# Altium PCB 175-00060, rev1, PCB, NRES RTD_TEC Board.PcbDoc (part 2 of 3)
Units mm, origin at the board's own origin, x right, y up, seen from the top; angles counter-clockwise.
Board outline 188.3 x 85 mm, 7 copper layers (Top Layer (*.GTL), MidLayer1 (*.G1), InternalPlane1 (*.GP1), InternalPlane2 (*.GP2), InternalPlane3 (*.GP3), InternalPlane4 (*.GP4), Bottom Layer (*.GBL)); 241 components, 178 nets, 958 pads, 584 vias.
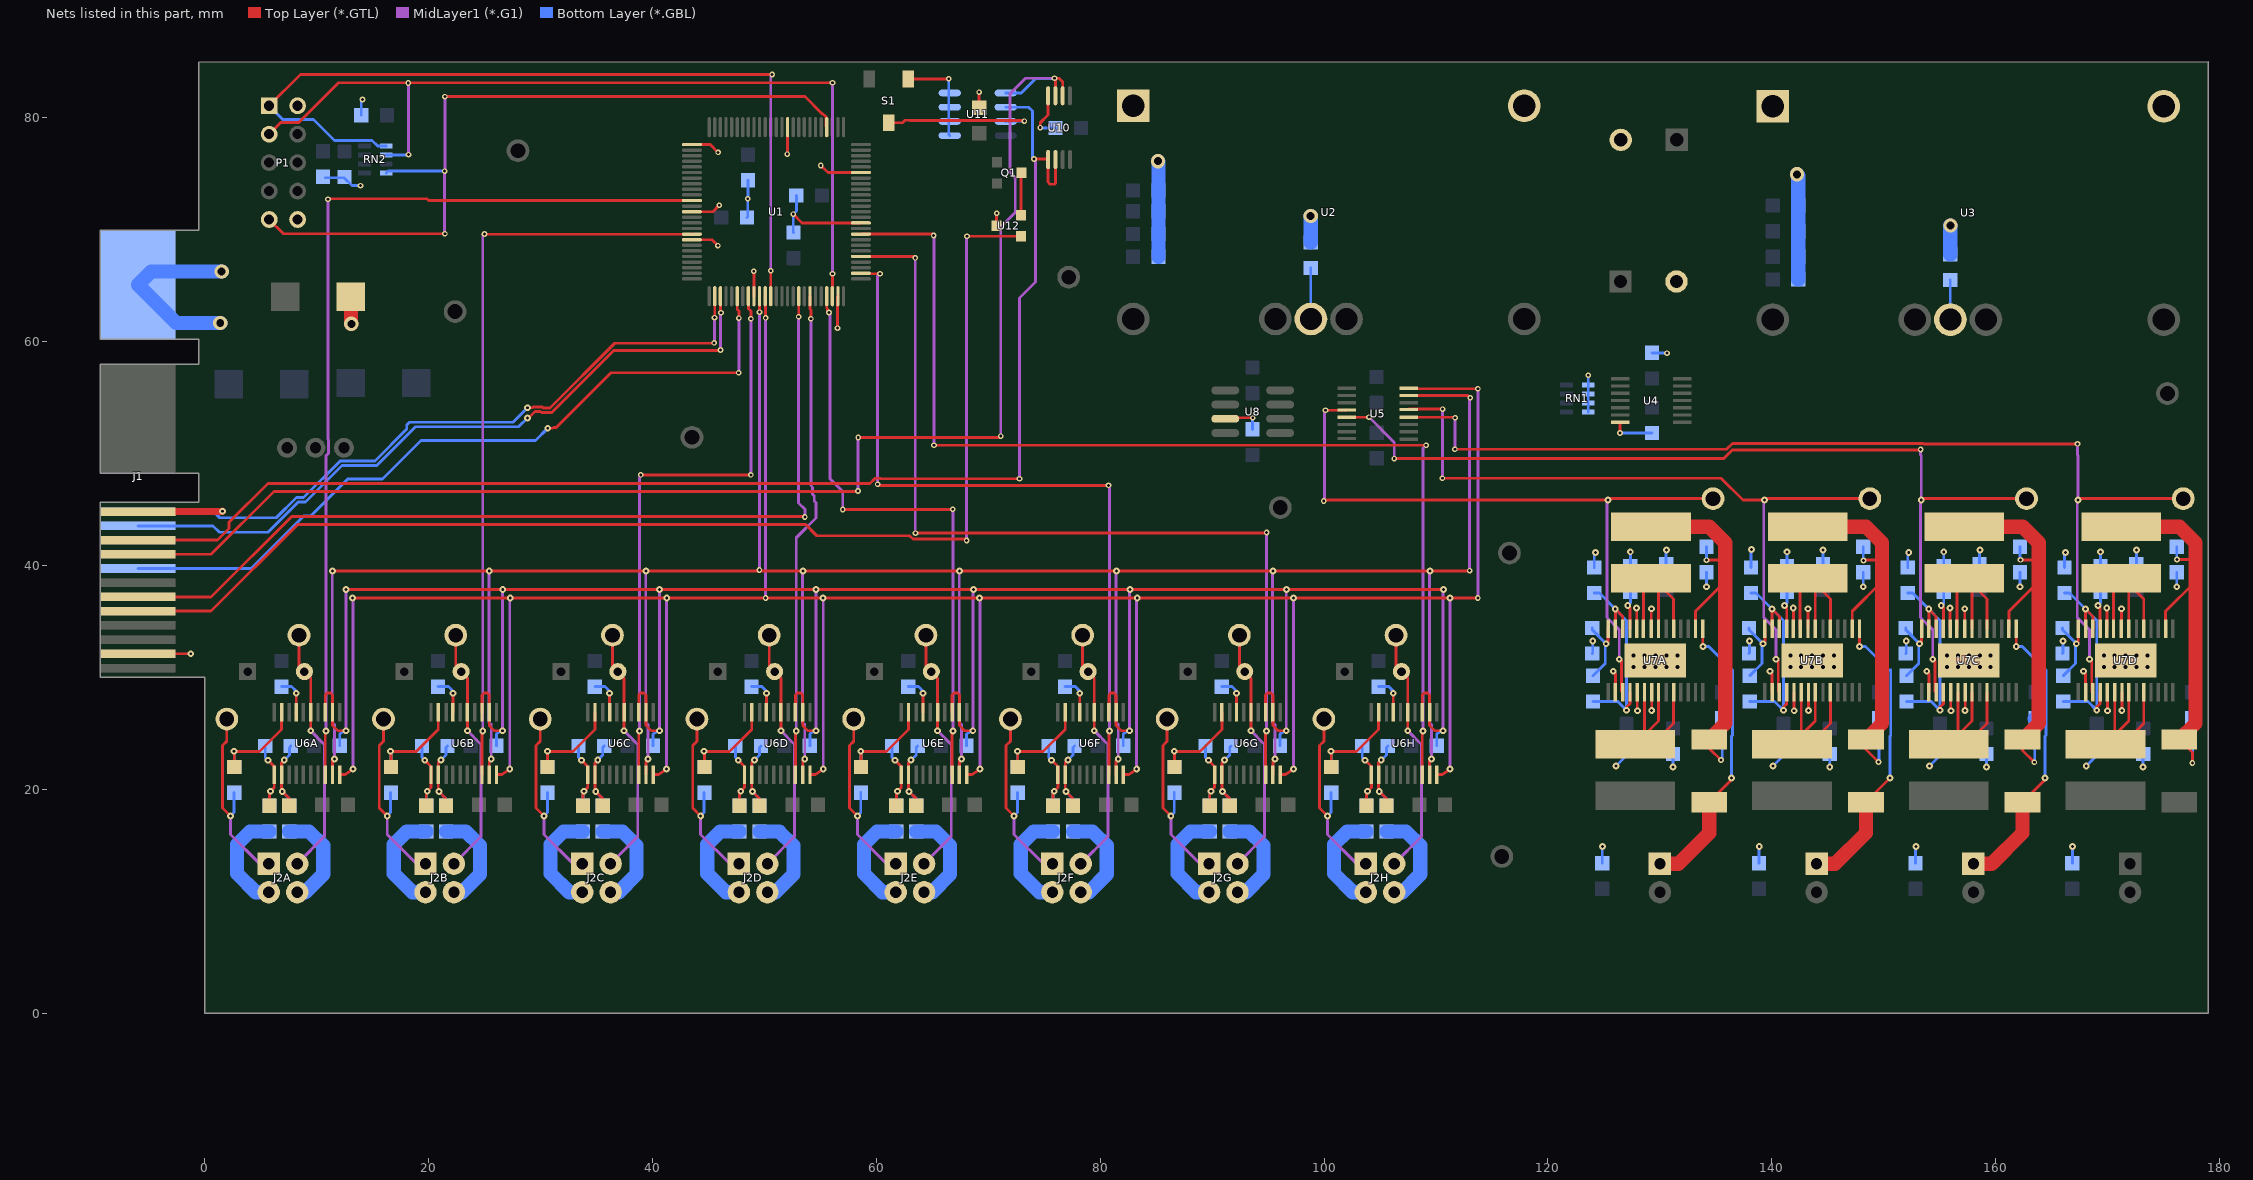
[diagram p7: the nets of this part, all layers, seen from the top]

## Via types
v1: diameter 0.61, hole 0.254, Top Layer (*.GTL) to Bottom Layer (*.GBL), tented both sides, 359 vias
v2: diameter 0.508, hole 0.254, Top Layer (*.GTL) to Bottom Layer (*.GBL), tented both sides, 105 vias
v3: diameter 0.508, hole 0.254, Top Layer (*.GTL) to Bottom Layer (*.GBL), 103 vias
v4: diameter 1.27, hole 0.711, Top Layer (*.GTL) to Bottom Layer (*.GBL), 17 vias

## Nets (pads, with @x,y where several pads share a name; then routed paths per layer and width w, separated by ;. In a path a pad name is that pad's centre, name@x,y a point inside that pad or via, vN(x,y) a via of type N, cw(c..) or ccw(c..) an arc to the next point about the centre after c; other vN are vias at no path point) (continued)
B1: J1.S8 U1.56 | length 67.8
  Top Layer (*.GTL) w0.254: v1(30.658,52.248) 31.086,52.248 31.162,52.324 31.413,52.324 36.29,57.201 v2(47.701,57.201) ; U1.56@47.573,64.038 47.573,62.858 47.727,62.705 v2(47.727,62.078)
  MidLayer1 (*.G1) w0.254: v2(47.701,57.201) 47.727,57.226 v2(47.727,62.078)
  Bottom Layer (*.GBL) w0.254: J1.S8@-5.95,39.715 4.163,39.715 8.872,44.425 9.513,44.425 12.789,47.701 15.88,47.701 19.334,51.156 29.566,51.156 v1(30.658,52.248)
D: C11.2 C12.2 C16A.1 C16B.1 C16C.1 C16D.1 C16E.1 C16F.1 C16G.1 C16H.1 C32.1 C35.2 C36.2 C37.1 C38.1 C39.1 C40.1 C41.1 C42.1 J1.S14 J1.S24 P1.2 P1.10 S1.1 U1.11 U1.26 U1.38 U1.43 U1.59 U1.74 U1.86 U1.95 U4.7 U6A.2 U6A.3 U6B.2 U6B.3 U6C.2 U6C.3 U6D.2 U6D.3 U6E.2 U6E.3 U6F.2 U6F.3 U6G.2 U6G.3 U6H.2 U6H.3 U10.4 U11.1 U11.2 U11.3 U11.4 | length 333.8
  Top Layer (*.GTL) w0.254: J1.S14@-5.95,32.095 v1(-1.234,32.095) v1@-1.219,32.08 ; U6A.3@10.774,26.861 10.774,28.427 10.947,28.6 11.252,28.6 11.424,28.428 11.424,25.685 11.862,25.248 v1(12.624,25.222) ; v1(12.624,37.846) v1(26.632,37.846) v1(40.64,37.846) v1(54.624,37.846) v1(68.675,37.846) v1(82.675,37.846) v1(96.647,37.846) v1(110.675,37.846) ; U6B.3@24.774,26.861 24.774,28.427 24.947,28.6 25.252,28.6 25.424,28.428 25.424,25.685 25.862,25.248 v1(26.624,25.222) ; U6C.3@38.774,26.861 38.774,28.427 38.947,28.6 39.252,28.6 39.424,28.428 39.424,25.685 39.862,25.248 v1(40.624,25.222) ; U1.43@43.523,69.088 45.314,69.088 v3(45.847,68.555) ; U1.38@43.523,71.588 45.401,71.588 v3(45.974,72.161) ; U1.26@43.523,77.588 45.17,77.588 v3(45.872,76.886) ; v3(49.047,66.269) 49.073,66.243 U1.59@49.073,64.038 ; v3(52.045,76.733) 52.073,76.762 U1.11@52.073,79.138 ; v3(52.578,71.374) 53.364,70.588 U1.86@58.623,70.588 ; U6D.3@52.774,26.861 52.774,28.427 52.947,28.6 53.252,28.6 53.424,28.428 53.424,25.685 53.862,25.248 v1(54.624,25.222) ; v3(55.042,75.717) 55.671,75.088 U1.95@58.623,75.088 ; v3(56.54,61.189) 56.54,64.005 U1.74@56.573,64.038 ; S1.1@62.862,83.433 66.441,83.433 v3(66.472,83.464) ; U6E.3@66.774,26.861 66.774,28.427 66.947,28.6 67.252,28.6 67.424,28.428 67.424,25.685 67.862,25.248 v1(68.624,25.222) ; C36.2@69.19,80.874 v3(69.19,82.271) ; v3(74.651,79.096) 74.651,79.527 75.352,80.229 U10.4@75.352,81.946 ; U6F.3@80.774,26.861 80.774,28.427 80.947,28.6 81.252,28.6 81.424,28.428 81.424,25.685 81.862,25.248 v1(82.624,25.222) ; U6G.3@94.774,26.861 94.774,28.427 94.947,28.6 95.252,28.6 95.424,28.428 95.424,25.685 95.862,25.248 v1(96.624,25.222) ; U6H.3@108.774,26.861 108.774,28.427 108.947,28.6 109.252,28.6 109.424,28.428 109.424,25.685 109.862,25.248 v1(110.624,25.222) ; v3(126.441,51.816) 126.441,52.759 U4.7@126.454,52.772
  Top Layer (*.GTL) w0.635: J1.S24@-5.95,44.795 1.565,44.795 v1(1.6,44.831)
  MidLayer1 (*.G1) w0.254: v1(12.624,25.222) v1(12.624,37.846) ; v1(26.624,25.222) v1@26.624,37.846 ; v1(40.624,25.222) v1@40.624,37.846 ; v1(54.624,25.222) v1(54.624,37.846) ; v1(68.624,25.222) v1@68.624,37.846 ; v1(82.624,25.222) v1@82.624,37.846 ; v1(96.624,25.222) v1@96.624,37.846 ; v1(110.624,25.222) v1@110.624,37.846
  Bottom Layer (*.GBL) w0.254: C38.1@10.795,74.625 12.446,74.625 13.157,73.914 v3(13.919,73.914) ; C16A.1@12.065,23.876 12.065,24.943 v1(12.624,25.222) ; C32.1@13.995,80.213 13.995,81.509 v3(14.097,81.61) ; C16B.1@26.065,23.876 26.065,24.943 v1(26.624,25.222) ; C16C.1@40.065,23.876 40.065,24.943 v1(40.624,25.222) ; C42.1@48.438,71.069 48.514,71.145 v3(48.514,72.746) 48.539,72.771 C40.1@48.539,74.397 ; C37.1@52.603,69.723 52.578,69.748 v3(52.578,71.374) 52.857,71.653 C41.1@52.857,73.025 ; C16D.1@54.065,23.876 54.065,24.943 v1(54.624,25.222) ; v3(66.472,83.464) 66.472,78.475 U11.1@66.563,78.384 ; C16E.1@68.065,23.876 68.065,24.943 v1(68.624,25.222) ; v3(74.651,79.096) 74.676,79.07 C35.2@75.997,79.07 ; C16F.1@82.065,23.876 82.065,24.943 v1(82.624,25.222) ; C16G.1@96.065,23.876 96.065,24.943 v1(96.624,25.222) ; C16H.1@110.065,23.876 110.065,24.943 v1(110.624,25.222) ; v3(126.441,51.816) C11.2@129.286,51.816 ; C12.2@129.286,58.979 130.607,58.979 v3(130.632,58.953)
DACOUT_0: TP9A.1 U5.4 U7A.3 | length 62.8
  Top Layer (*.GTL) w0.254: v3(99.974,45.745) 100.056,45.827 v1(125.352,45.827) 125.479,45.954 TP9A.1@134.75,45.954 ; v3(100.127,53.848) 101.981,53.848 U5.4@102.006,53.873 ; v1(126.368,31.603) 126.444,31.603 126.571,31.476 126.571,28.753 U7A.3@126.675,28.648
  MidLayer1 (*.G1) w0.254: v3(99.974,45.745) 100.051,45.822 100.051,53.772 v3(100.127,53.848) ; v1(125.352,45.827) 125.276,45.75 125.276,35.336 126.368,34.244 v1(126.368,31.603)
DACOUT_1: TP9B.1 U5.13 U7B.3 | length 66.1
  Top Layer (*.GTL) w0.254: U5.13@107.556,53.923 107.583,53.95 v3(110.592,53.95) ; v3(110.566,47.777) 135.458,47.777 137.409,45.827 v1(139.352,45.827) 139.479,45.954 TP9B.1@148.75,45.954 ; v1(140.368,31.603) 140.444,31.603 140.571,31.476 140.571,28.753 U7B.3@140.675,28.648
  MidLayer1 (*.G1) w0.254: v3(110.566,47.777) 110.566,53.924 v3(110.592,53.95) ; v1(139.352,45.827) 139.276,45.75 139.276,35.336 140.368,34.244 v1(140.368,31.603)
DACOUT_2: TP9C.1 U5.5 U7C.3 | length 85.8
  Top Layer (*.GTL) w0.254: U5.5@102.006,53.223 103.998,53.223 v3(104.013,53.238) ; v3(106.274,49.53) 135.698,49.53 136.463,50.295 153.242,50.295 v3(153.289,50.343) ; v1(153.352,45.827) 153.479,45.954 TP9C.1@162.75,45.954 ; v1(154.368,31.603) 154.444,31.603 154.571,31.476 154.571,28.753 U7C.3@154.675,28.648
  MidLayer1 (*.G1) w0.254: v3(104.013,53.238) 106.274,50.978 v3(106.274,49.53) ; v3(153.289,50.343) 153.289,49.877 153.352,49.814 v1(153.352,45.827) 153.276,45.75 153.276,35.336 154.368,34.244 v1(154.368,31.603)
DACOUT_3: TP9D.1 U5.12 U7D.3 | length 95.2
  Top Layer (*.GTL) w0.254: U5.12@107.556,53.223 111.673,53.223 v3(111.709,53.188) ; v3(111.684,50.368) 135.961,50.368 136.469,50.876 153.51,50.876 153.535,50.851 v3(167.31,50.851) ; v1(167.352,45.827) 167.479,45.954 TP9D.1@176.75,45.954 ; v1(168.368,31.603) 168.444,31.603 168.571,31.476 168.571,28.753 U7D.3@168.675,28.648
  MidLayer1 (*.G1) w0.254: v3(111.684,50.368) 111.709,50.394 v3(111.709,53.188) ; v3(167.31,50.851) 167.31,49.856 167.352,49.814 v1(167.352,45.827) 167.276,45.75 167.276,35.336 168.368,34.244 v1(168.368,31.603)
DIN: U1.60 U5.15 U6A.19 U6B.19 U6C.19 U6D.19 U6E.19 U6F.19 U6G.19 U6H.19 | length 293.9
  Top Layer (*.GTL) w0.254: U6A.19@11.424,21.311 11.424,22.524 v1(11.608,22.708) ; v1(11.43,39.497) v1(25.43,39.497) v1(39.43,39.497) v1(53.455,39.497) v1(67.437,39.497) v1(81.455,39.497) v1(95.43,39.497) v1(109.455,39.497) 112.979,39.497 v3(113.005,39.522) ; U6B.19@25.424,21.311 25.424,22.524 v1(25.608,22.708) ; U6C.19@39.424,21.311 39.424,22.524 v1(39.608,22.708) ; v2(49.573,62.619) U1.60@49.573,64.038 ; U6D.19@53.424,21.311 53.424,22.524 v1(53.608,22.708) ; U6E.19@67.424,21.311 67.424,22.524 v1(67.608,22.708) ; U6F.19@81.424,21.311 81.424,22.524 v1(81.608,22.708) ; U6G.19@95.424,21.311 95.424,22.524 v1(95.608,22.708) ; U5.15@107.556,55.173 112.848,55.173 v3(113.055,54.966) ; U6H.19@109.424,21.311 109.424,22.524 v1(109.608,22.708)
  MidLayer1 (*.G1) w0.254: v1@11.405,39.497 v1@11.405,39.472 ; v1(11.43,39.497) v1@11.405,39.472 ; v1(11.608,22.708) 11.608,25.762 11.405,25.965 v1@11.405,39.472 ; v1@25.405,39.497 25.405,25.965 25.608,25.762 v1(25.608,22.708) ; v1@39.405,39.497 39.405,25.965 39.608,25.762 v1(39.608,22.708) ; v2(49.555,39.573) 49.573,39.591 v2(49.573,62.619) ; v1@53.405,39.497 53.405,25.965 53.608,25.762 v1(53.608,22.708) ; v1@67.405,39.497 67.405,25.965 67.608,25.762 v1(67.608,22.708) ; v1@81.405,39.497 81.405,25.965 81.608,25.762 v1(81.608,22.708) ; v1@95.405,39.497 95.405,25.965 95.608,25.762 v1(95.608,22.708) ; v1@109.405,39.497 109.405,25.965 109.608,25.762 v1(109.608,22.708) ; v3(113.005,39.522) 113.005,54.915 v3(113.055,54.966)
DIN_FPGA: J1.S12 U1.52 | length 62.7
  Top Layer (*.GTL) w0.254: v1(28.829,54.077) 29.257,54.077 29.333,54.153 30.154,54.153 30.255,54.051 30.842,54.051 36.633,59.842 v2@45.517,59.842 ; v2(45.542,62.128) 45.568,62.128 45.573,62.134 U1.52@45.573,64.038
  MidLayer1 (*.G1) w0.254: v2(45.517,59.868) 45.542,59.893 v2(45.542,62.128)
  Bottom Layer (*.GBL) w0.254: J1.S12@-5.95,44.795 0.81,44.795 1.358,44.247 6.395,44.247 8.199,46.05 8.839,46.05 12.116,49.327 15.207,49.327 18.059,52.179 18.059,52.543 18.297,52.781 27.534,52.781 v1(28.829,54.077)
DOUT: J1.S18 U1.67 | length 82.5
  Top Layer (*.GTL) w0.254: J1.S18@-5.95,37.175 0.584,37.175 7.783,44.374 53.569,44.374 v2(53.619,44.323) ; v2(53.061,62.205) 53.073,62.217 U1.67@53.073,64.038
  MidLayer1 (*.G1) w0.254: v2(53.061,62.205) 53.061,45.568 53.619,45.009 v2(53.619,44.323)
DOUT_0: U1.36 U6A.18 | length 84.1
  Top Layer (*.GTL) w0.254: U6A.18@10.774,21.311 10.774,25.125 v1(10.846,25.197) ; v2(11.024,72.695) 11.074,72.746 19.855,72.746 20.013,72.588 U1.36@43.523,72.588
  MidLayer1 (*.G1) w0.254: v1(10.846,25.197) 10.846,49.783 11.074,50.011 11.074,51.208 11.024,51.259 v2(11.024,72.695)
DOUT_1: U1.42 U6B.18 | length 66.9
  Top Layer (*.GTL) w0.254: U6B.18@24.774,21.311 24.774,25.125 v1(24.846,25.197) ; v2(24.994,69.596) 25.019,69.571 43.506,69.571 U1.42@43.523,69.588
  MidLayer1 (*.G1) w0.254: v1(24.846,25.197) 24.846,69.448 v2(24.994,69.596)
DOUT_2: U1.58 U6C.18 | length 52.7
  Top Layer (*.GTL) w0.254: U6C.18@38.774,21.311 38.774,25.125 v1(38.846,25.197) ; v2(38.964,48.082) v2(48.793,48.082) ; U1.58@48.573,64.038 48.573,62.925 48.793,62.705 v2(48.793,62.027)
  MidLayer1 (*.G1) w0.254: v1(38.846,25.197) 38.846,47.964 v2(38.964,48.082) ; v2(48.793,48.082) v2(48.793,62.027)
DOUT_3: U1.69 U6D.18 | length 43.7
  Top Layer (*.GTL) w0.254: U6D.18@52.774,21.311 52.774,25.125 v1(52.846,25.197) ; U1.69@54.073,64.038 54.073,62.886 54.153,62.807 54.153,62.285 54.127,62.26 54.127,62.052 v2(54.153,62.027)
  MidLayer1 (*.G1) w0.254: v1(52.846,25.197) 52.846,42.457 54.61,44.221 54.61,45.601 54.458,45.753 54.458,46.195 54.305,46.347 54.305,46.965 54.153,47.117 v2(54.153,62.027)
DOUT_4: U1.72 U6E.18 | length 53.3
  Top Layer (*.GTL) w0.254: U1.72@55.573,64.038 55.573,62.977 55.651,62.899 55.651,62.662 55.728,62.586 v2(55.778,62.586) ; v2(56.998,44.983) 66.802,44.983 v2(66.827,45.009) ; U6E.18@66.774,21.311 66.774,25.125 v1(66.846,25.197)
  MidLayer1 (*.G1) w0.254: v2(55.778,62.586) 55.855,62.509 55.855,47.727 56.998,46.584 v2(56.998,44.983) ; v2(66.827,45.009) 66.846,44.99 v1(66.846,25.197)
DOUT_5: U1.77 U6F.18 | length 67.2
  Top Layer (*.GTL) w0.254: U1.77@58.623,66.088 58.671,66.04 v2(60.325,66.04) ; v2(60.122,47.244) 60.223,47.142 v2(80.747,47.142) ; U6F.18@80.774,21.311 80.774,25.125 v1(80.846,25.197)
  MidLayer1 (*.G1) w0.254: v2(60.122,47.244) 60.122,65.837 v2(60.325,66.04) ; v2(80.747,47.142) 80.846,47.043 v1(80.846,25.197)
DOUT_6: U1.80 U6G.18 | length 82.5
  Top Layer (*.GTL) w0.254: U1.80@58.623,67.588 63.349,67.588 v2(63.475,67.462) ; v2(63.5,42.875) 94.818,42.875 v2(94.869,42.926) ; U6G.18@94.774,21.311 94.774,25.125 v1(94.846,25.197)
  MidLayer1 (*.G1) w0.254: v2(63.475,67.462) 63.475,42.901 v2(63.5,42.875) ; v1(94.846,25.197) v2@94.846,42.926
DOUT_7: U1.84 U6H.18 | length 98.8
  Top Layer (*.GTL) w0.254: U1.84@58.623,69.588 65.007,69.588 v2(65.126,69.469) ; v2(65.151,50.724) v2(109.118,50.724) ; U6H.18@108.774,21.311 108.774,25.125 v1(108.846,25.197)
  MidLayer1 (*.G1) w0.254: v2(65.126,69.469) 65.151,69.444 v2(65.151,50.724) ; v1(108.846,25.197) 108.846,50.451 v2(109.118,50.724)
FORCE+A: C14A.2 R3A.2 U6A.9 | length 9.4
  Top Layer (*.GTL) w0.254: v1(2.616,23.393) v1@2.642,23.368 ; C14A.2@2.642,21.971 v1@2.642,23.368 ; U6A.9@6.874,26.861 6.874,25.34 4.902,23.368 v1@2.642,23.368
  Bottom Layer (*.GBL) w0.254: v1(2.616,23.393) 2.642,23.368 R3A.2@2.642,21.971
FORCE+B: C14B.2 R3B.2 U6B.9 | length 9.4
  Top Layer (*.GTL) w0.254: v1(16.616,23.393) v1@16.642,23.368 ; C14B.2@16.642,21.971 v1@16.642,23.368 ; U6B.9@20.874,26.861 20.874,25.34 18.902,23.368 v1@16.642,23.368
  Bottom Layer (*.GBL) w0.254: v1(16.616,23.393) 16.642,23.368 R3B.2@16.642,21.971
FORCE+C: C14C.2 R3C.2 U6C.9 | length 9.4
  Top Layer (*.GTL) w0.254: v1(30.616,23.393) v1@30.642,23.368 ; C14C.2@30.642,21.971 v1@30.642,23.368 ; U6C.9@34.874,26.861 34.874,25.34 32.902,23.368 v1@30.642,23.368
  Bottom Layer (*.GBL) w0.254: v1(30.616,23.393) 30.642,23.368 R3C.2@30.642,21.971
FORCE+D: C14D.2 R3D.2 U6D.9 | length 9.4
  Top Layer (*.GTL) w0.254: v1(44.616,23.393) v1@44.642,23.368 ; C14D.2@44.642,21.971 v1@44.642,23.368 ; U6D.9@48.874,26.861 48.874,25.34 46.902,23.368 v1@44.642,23.368
  Bottom Layer (*.GBL) w0.254: v1(44.616,23.393) 44.642,23.368 R3D.2@44.642,21.971
FORCE+E: C14E.2 R3E.2 U6E.9 | length 9.4
  Top Layer (*.GTL) w0.254: v1(58.616,23.393) v1@58.642,23.368 ; C14E.2@58.642,21.971 v1@58.642,23.368 ; U6E.9@62.874,26.861 62.874,25.34 60.902,23.368 v1@58.642,23.368
  Bottom Layer (*.GBL) w0.254: v1(58.616,23.393) 58.642,23.368 R3E.2@58.642,21.971
FORCE+F: C14F.2 R3F.2 U6F.9 | length 9.4
  Top Layer (*.GTL) w0.254: v1(72.616,23.393) v1@72.642,23.368 ; C14F.2@72.642,21.971 v1@72.642,23.368 ; U6F.9@76.874,26.861 76.874,25.34 74.902,23.368 v1@72.642,23.368
  Bottom Layer (*.GBL) w0.254: v1(72.616,23.393) 72.642,23.368 R3F.2@72.642,21.971
FORCE+G: C14G.2 R3G.2 U6G.9 | length 9.4
  Top Layer (*.GTL) w0.254: v1(86.616,23.393) v1@86.642,23.368 ; C14G.2@86.642,21.971 v1@86.642,23.368 ; U6G.9@90.874,26.861 90.874,25.34 88.902,23.368 v1@86.642,23.368
  Bottom Layer (*.GBL) w0.254: v1(86.616,23.393) 86.642,23.368 R3G.2@86.642,21.971
FORCE+H: C14H.2 R3H.2 U6H.9 | length 9.4
  Top Layer (*.GTL) w0.254: v1(100.616,23.393) v1@100.642,23.368 ; C14H.2@100.642,21.971 v1@100.642,23.368 ; U6H.9@104.874,26.861 104.874,25.34 102.902,23.368 v1@100.642,23.368
  Bottom Layer (*.GBL) w0.254: v1(100.616,23.393) 100.642,23.368 R3H.2@100.642,21.971
FORCE-A: J2A.4 R6A.2 TP6A.1 U6A.5 | length 22.5
  Top Layer (*.GTL) w0.254: TP6A.1@8.433,33.757 8.433,30.988 R6A.2@8.915,30.505 ; R6A.2@9.017,30.607 R6A.2@8.915,30.505 ; v1(9.474,25.222) U6A.5@9.474,26.861 9.474,29.947 R6A.2@8.915,30.505
  MidLayer1 (*.G1) w0.254: J2A.4@8.27,13.34 10.693,15.763 10.693,24.003 v1(9.474,25.222)
FORCE-B: J2B.4 R6B.2 TP6B.1 U6B.5 | length 22.5
  Top Layer (*.GTL) w0.254: TP6B.1@22.433,33.757 22.433,30.988 R6B.2@22.915,30.505 ; R6B.2@23.017,30.607 R6B.2@22.915,30.505 ; v1(23.474,25.222) U6B.5@23.474,26.861 23.474,29.947 R6B.2@22.915,30.505
  MidLayer1 (*.G1) w0.254: J2B.4@22.27,13.34 24.693,15.763 24.693,24.003 v1(23.474,25.222)
FORCE-C: J2C.4 R6C.2 TP6C.1 U6C.5 | length 22.5
  Top Layer (*.GTL) w0.254: TP6C.1@36.433,33.757 36.433,30.988 R6C.2@36.915,30.505 ; R6C.2@37.017,30.607 R6C.2@36.915,30.505 ; v1(37.474,25.222) U6C.5@37.474,26.861 37.474,29.947 R6C.2@36.915,30.505
  MidLayer1 (*.G1) w0.254: J2C.4@36.27,13.34 38.693,15.763 38.693,24.003 v1(37.474,25.222)
FORCE-D: J2D.4 R6D.2 TP6D.1 U6D.5 | length 22.5
  Top Layer (*.GTL) w0.254: TP6D.1@50.433,33.757 50.433,30.988 R6D.2@50.915,30.505 ; R6D.2@51.017,30.607 R6D.2@50.915,30.505 ; v1(51.474,25.222) U6D.5@51.474,26.861 51.474,29.947 R6D.2@50.915,30.505
  MidLayer1 (*.G1) w0.254: J2D.4@50.27,13.34 52.693,15.763 52.693,24.003 v1(51.474,25.222)
FORCE-E: J2E.4 R6E.2 TP6E.1 U6E.5 | length 22.5
  Top Layer (*.GTL) w0.254: TP6E.1@64.433,33.757 64.433,30.988 R6E.2@64.915,30.505 ; R6E.2@65.017,30.607 R6E.2@64.915,30.505 ; v1(65.474,25.222) U6E.5@65.474,26.861 65.474,29.947 R6E.2@64.915,30.505
  MidLayer1 (*.G1) w0.254: J2E.4@64.27,13.34 66.693,15.763 66.693,24.003 v1(65.474,25.222)
FORCE-F: J2F.4 R6F.2 TP6F.1 U6F.5 | length 22.5
  Top Layer (*.GTL) w0.254: TP6F.1@78.433,33.757 78.433,30.988 R6F.2@78.915,30.505 ; R6F.2@79.017,30.607 R6F.2@78.915,30.505 ; v1(79.474,25.222) U6F.5@79.474,26.861 79.474,29.947 R6F.2@78.915,30.505
  MidLayer1 (*.G1) w0.254: J2F.4@78.27,13.34 80.693,15.763 80.693,24.003 v1(79.474,25.222)
FORCE-G: J2G.4 R6G.2 TP6G.1 U6G.5 | length 22.5
  Top Layer (*.GTL) w0.254: TP6G.1@92.433,33.757 92.433,30.988 R6G.2@92.915,30.505 ; R6G.2@93.017,30.607 R6G.2@92.915,30.505 ; v1(93.474,25.222) U6G.5@93.474,26.861 93.474,29.947 R6G.2@92.915,30.505
  MidLayer1 (*.G1) w0.254: J2G.4@92.27,13.34 94.693,15.763 94.693,24.003 v1(93.474,25.222)
FORCE-H: J2H.4 R6H.2 TP6H.1 U6H.5 | length 22.5
  Top Layer (*.GTL) w0.254: TP6H.1@106.433,33.757 106.433,30.988 R6H.2@106.915,30.505 ; R6H.2@107.017,30.607 R6H.2@106.915,30.505 ; v1(107.474,25.222) U6H.5@107.474,26.861 107.474,29.947 R6H.2@106.915,30.505
  MidLayer1 (*.G1) w0.254: J2H.4@106.27,13.34 108.693,15.763 108.693,24.003 v1(107.474,25.222)
GND: U12.3 | length 1.1
  Top Layer (*.GTL) w0.254: U12.3@70.739,70.333 70.739,71.425 v3(70.764,71.45)
I2C_SCL: J1.S22 U10.5 U10.6 U11.6 | length 123.7
  Top Layer (*.GTL) w0.254: J1.S22@-5.95,42.255 1.139,42.255 2.172,43.288 2.172,43.843 5.649,47.32 59.444,47.32 59.901,47.777 60.343,47.777 60.394,47.727 v2(72.796,47.727) ; v3(74.092,76.302) 75.296,76.302 U10.5@75.352,76.246 75.352,74.229 75.54,74.041 75.921,74.041 76.002,74.122 U10.6@76.002,76.246
  MidLayer1 (*.G1) w0.254: v2(72.796,47.727) 72.796,63.881 74.219,65.303 74.219,76.175 v3(74.092,76.302)
  Bottom Layer (*.GBL) w0.254: U11.6@71.563,80.924 73.609,80.924 73.965,80.569 73.965,76.429 v3(74.092,76.302)
I2C_SDA: J1.S21 U10.2 U10.3 U11.5 | length 128.7
  Top Layer (*.GTL) w0.254: J1.S21@-5.95,40.985 0.584,40.985 6.182,46.584 58.318,46.584 v2(58.369,46.634) ; v2(58.395,51.41) 70.993,51.41 v2(71.12,51.537) ; U10.3@76.002,81.946 76.002,83.434 v3(75.921,83.515) 76.317,83.515 76.652,83.18 U10.2@76.652,81.946
  MidLayer1 (*.G1) w0.254: v2(58.369,46.634) 58.369,51.384 v2(58.395,51.41) ; v2(71.12,51.537) 71.12,70.231 72.415,71.526 72.415,74.625 71.933,75.108 71.933,82.118 73.33,83.515 v3(75.921,83.515)
  Bottom Layer (*.GBL) w0.254: U11.5@71.563,82.194 72.949,82.194 74.244,83.49 75.895,83.49 v3(75.921,83.515)
NetC20A_2: C20A.2 U6A.7 | length 3.4
  Top Layer (*.GTL) w0.254: U6A.7@8.174,26.861 8.179,26.865 v1(8.179,28.575)
  Bottom Layer (*.GBL) w0.254: C20A.2@6.858,29.159 7.772,29.159 8.179,28.753 v1(8.179,28.575)
NetC20B_2: C20B.2 U6B.7 | length 3.4
  Top Layer (*.GTL) w0.254: U6B.7@22.174,26.861 22.179,26.865 v1(22.179,28.575)
  Bottom Layer (*.GBL) w0.254: C20B.2@20.858,29.159 21.772,29.159 22.179,28.753 v1(22.179,28.575)
NetC20C_2: C20C.2 U6C.7 | length 3.4
  Top Layer (*.GTL) w0.254: U6C.7@36.174,26.861 36.179,26.865 v1(36.179,28.575)
  Bottom Layer (*.GBL) w0.254: C20C.2@34.858,29.159 35.772,29.159 36.179,28.753 v1(36.179,28.575)
NetC20D_2: C20D.2 U6D.7 | length 3.4
  Top Layer (*.GTL) w0.254: U6D.7@50.174,26.861 50.179,26.865 v1(50.179,28.575)
  Bottom Layer (*.GBL) w0.254: C20D.2@48.858,29.159 49.772,29.159 50.179,28.753 v1(50.179,28.575)
NetC20E_2: C20E.2 U6E.7 | length 3.4
  Top Layer (*.GTL) w0.254: U6E.7@64.174,26.861 64.179,26.865 v1(64.179,28.575)
  Bottom Layer (*.GBL) w0.254: C20E.2@62.858,29.159 63.772,29.159 64.179,28.753 v1(64.179,28.575)
NetC20F_2: C20F.2 U6F.7 | length 3.4
  Top Layer (*.GTL) w0.254: U6F.7@78.174,26.861 78.179,26.865 v1(78.179,28.575)
  Bottom Layer (*.GBL) w0.254: C20F.2@76.858,29.159 77.772,29.159 78.179,28.753 v1(78.179,28.575)
NetC20G_2: C20G.2 U6G.7 | length 3.4
  Top Layer (*.GTL) w0.254: U6G.7@92.174,26.861 92.179,26.865 v1(92.179,28.575)
  Bottom Layer (*.GBL) w0.254: C20G.2@90.858,29.159 91.772,29.159 92.179,28.753 v1(92.179,28.575)
NetC20H_2: C20H.2 U6H.7 | length 3.4
  Top Layer (*.GTL) w0.254: U6H.7@106.174,26.861 106.179,26.865 v1(106.179,28.575)
  Bottom Layer (*.GBL) w0.254: C20H.2@104.858,29.159 105.772,29.159 106.179,28.753 v1(106.179,28.575)
NetC21A_1: C21A.1 C25A.2 L1A.2 R7A.2 U7A.16 | length 39.7
  Top Layer (*.GTL) w0.254: U7A.16@133.175,34.348 133.175,35.895 135.842,38.562 135.842,38.613 ; v3(134.163,40.462) 135.842,40.462 ; R7A.2@134.4,24.44 134.4,23.664 v3(135.458,22.606)
  Top Layer (*.GTL) w1.27: L1A.2@129.2,43.451 134.407,43.451 135.842,42.017 135.842,40.462 135.842,38.613 ; R7A.2@134.4,24.44 135.842,25.882 135.842,38.562
  Bottom Layer (*.GBL) w0.254: v3(134.163,40.462) 134.166,40.465 C21A.1@134.166,41.661 ; v3(135.458,22.606) 135.563,22.71 C25A.2@135.563,26.37
NetC21B_1: C21B.1 C25B.2 L1B.2 R7B.2 U7B.16 | length 40.1
  Top Layer (*.GTL) w0.254: U7B.16@147.175,34.348 147.175,35.895 149.842,38.562 ; v3(148.184,40.437) 148.234,40.488 149.842,40.488 ; R7B.2@148.4,24.44 148.4,23.558 v3(149.53,22.428)
  Top Layer (*.GTL) w1.27: L1B.2@143.2,43.451 148.407,43.451 149.842,42.017 149.842,40.488 149.842,38.562 149.842,25.882 R7B.2@148.4,24.44
  Bottom Layer (*.GBL) w0.254: C21B.1@148.166,41.661 148.166,40.455 v3(148.184,40.437) ; v3(149.53,22.428) 149.563,22.461 C25B.2@149.563,26.37
NetC21C_1: C21C.1 C25C.2 L1C.2 R7C.2 U7C.16 | length 40.1
  Top Layer (*.GTL) w0.254: U7C.16@161.175,34.348 161.175,35.895 163.842,38.562 163.842,38.613 ; v3(162.204,40.488) 163.817,40.488 163.842,40.513 ; R7C.2@162.4,24.44 162.4,23.452 v3(163.449,22.403)
  Top Layer (*.GTL) w1.27: L1C.2@157.2,43.451 162.407,43.451 163.842,42.017 163.842,40.513 163.842,38.613 ; R7C.2@162.4,24.44 163.842,25.882 163.842,38.562
  Bottom Layer (*.GBL) w0.254: C21C.1@162.166,41.661 162.166,40.526 v3(162.204,40.488) ; v3(163.449,22.403) 163.486,22.44 C25C.2@163.486,26.294
  Bottom Layer (*.GBL) w1.27: C25C.2@163.486,26.294 C25C.2@163.563,26.37
NetC21D_1: C21D.1 C25D.2 L1D.2 R7D.2 U7D.16 | length 40.2
  Top Layer (*.GTL) w0.254: U7D.16@175.175,34.348 175.175,35.895 177.842,38.562 177.842,38.613 ; v3(176.2,40.513) 177.817,40.513 177.842,40.488 ; R7D.2@176.4,24.44 177.563,23.277 v3(177.563,22.335)
  Top Layer (*.GTL) w1.27: L1D.2@171.2,43.451 176.407,43.451 177.842,42.017 177.842,40.488 177.842,38.613 ; R7D.2@176.4,24.44 177.842,25.882 177.842,38.562
  Bottom Layer (*.GBL) w0.254: C21D.1@176.166,41.661 176.166,40.547 v3(176.2,40.513) ; v3(177.563,22.335) C25D.2@177.563,26.37
NetC26A_2: C26A.2 R8A.2 U7A.4 U7A.26 U7A.27 | length 20.7
  Top Layer (*.GTL) w0.254: v1(126.012,36.098) v1@126.025,36.086 ; U7A.27@126.025,34.348 v1@126.025,36.086 ; U7A.26@126.675,34.348 126.675,35.436 v1@126.025,36.086 ; v1(127.028,27.056) 127.028,27.335 127.325,27.632 U7A.4@127.325,28.648
  Bottom Layer (*.GBL) w0.254: R8A.2@124.031,27.843 126.241,27.843 v1(127.028,27.056) 127.028,35.082 v1(126.012,36.098) 124.59,37.521 C26A.2@124.133,37.521
NetC26B_2: C26B.2 R8B.2 U7B.4 U7B.26 U7B.27 | length 20.7
  Top Layer (*.GTL) w0.254: v1(140.012,36.098) v1@140.025,36.086 ; U7B.27@140.025,34.348 v1@140.025,36.086 ; U7B.26@140.675,34.348 140.675,35.436 v1@140.025,36.086 ; v1(141.028,27.056) 141.028,27.335 141.325,27.632 U7B.4@141.325,28.648
  Bottom Layer (*.GBL) w0.254: R8B.2@138.031,27.843 140.241,27.843 v1(141.028,27.056) 141.028,35.082 v1(140.012,36.098) 138.59,37.521 C26B.2@138.133,37.521
NetC26C_2: C26C.2 R8C.2 U7C.4 U7C.26 U7C.27 | length 20.7
  Top Layer (*.GTL) w0.254: v1(154.012,36.098) v1@154.025,36.086 ; U7C.27@154.025,34.348 v1@154.025,36.086 ; U7C.26@154.675,34.348 154.675,35.436 v1@154.025,36.086 ; v1(155.028,27.056) 155.028,27.335 155.325,27.632 U7C.4@155.325,28.648
  Bottom Layer (*.GBL) w0.254: R8C.2@152.031,27.843 154.241,27.843 v1(155.028,27.056) 155.028,35.082 v1(154.012,36.098) 152.59,37.521 C26C.2@152.133,37.521
NetC26D_2: C26D.2 R8D.2 U7D.4 U7D.26 U7D.27 | length 20.7
  Top Layer (*.GTL) w0.254: v1(168.012,36.098) v1@168.025,36.086 ; U7D.27@168.025,34.348 v1@168.025,36.086 ; U7D.26@168.675,34.348 168.675,35.436 v1@168.025,36.086 ; v1(169.028,27.056) 169.028,27.335 169.325,27.632 U7D.4@169.325,28.648
  Bottom Layer (*.GBL) w0.254: R8D.2@166.031,27.843 168.241,27.843 v1(169.028,27.056) 169.028,35.082 v1(168.012,36.098) 166.59,37.521 C26D.2@166.133,37.521
NetC28A_2: C28A.2 U7A.25 | length 3.4
  Top Layer (*.GTL) w0.254: v1(127.13,36.403) 127.325,36.208 U7A.25@127.325,34.348
  Bottom Layer (*.GBL) w0.254: v1(127.13,36.403) 127.358,36.632 C28A.2@127.358,37.622
NetC28B_2: C28B.2 U7B.25 | length 3.4
  Top Layer (*.GTL) w0.254: v1(141.13,36.403) 141.325,36.208 U7B.25@141.325,34.348
  Bottom Layer (*.GBL) w0.254: v1(141.13,36.403) 141.358,36.632 C28B.2@141.358,37.622
NetC28C_2: C28C.2 U7C.25 | length 3.4
  Top Layer (*.GTL) w0.254: v1(155.13,36.403) 155.325,36.208 U7C.25@155.325,34.348
  Bottom Layer (*.GBL) w0.254: v1(155.13,36.403) 155.358,36.632 C28C.2@155.358,37.622
NetC28D_2: C28D.2 U7D.25 | length 3.4
  Top Layer (*.GTL) w0.254: v1(169.13,36.403) 169.325,36.208 U7D.25@169.325,34.348
  Bottom Layer (*.GBL) w0.254: v1(169.13,36.403) 169.358,36.632 C28D.2@169.358,37.622
NetC30_1: C30.1 U8.3 | length 3.5
  Top Layer (*.GTL) w0.254: U8.3@91.174,53.086 91.276,53.188 v3(93.624,53.188)
  Bottom Layer (*.GBL) w0.254: C30.1@93.599,52.146 93.599,53.162 v3(93.624,53.188)
NetJ2A_1: J2A.1 R3A.1 TP5A.1 | length 17.5
  Top Layer (*.GTL) w0.254: TP5A.1@1.981,26.264 1.981,24.282 1.6,23.901 1.6,18.313 v1(2.311,17.602)
  MidLayer1 (*.G1) w0.254: v1(2.311,17.602) 2.311,15.951 4.923,13.34 J2A.1@5.73,13.34
  Bottom Layer (*.GBL) w0.254: v1(2.311,17.602) 2.616,17.907 R3A.1@2.616,19.71
NetJ2A_2: J2A.2 R4A.1 | length 9.5
  Bottom Layer (*.GBL) w0.254: J2A.2@4.796,10.8 J2A.2@5.73,10.8
  Bottom Layer (*.GBL) w1.27: J2A.2@4.796,10.8 4.567,10.8 2.896,12.471 2.896,15.062 4.064,16.231 R4A.1@5.791,16.231
NetJ2A_3: J2A.3 R5A.1 | length 9.1
  Bottom Layer (*.GBL) w0.254: J2A.3@8.27,10.8 J2A.3@8.275,10.795
  Bottom Layer (*.GBL) w1.27: R5A.1@7.569,16.231 9.322,16.231 10.592,14.961 10.592,12.395 8.997,10.8 J2A.3@8.27,10.8
NetJ2B_1: J2B.1 R3B.1 TP5B.1 | length 17.5
  Top Layer (*.GTL) w0.254: TP5B.1@15.981,26.264 15.981,24.282 15.6,23.901 15.6,18.313 v1(16.311,17.602)
  MidLayer1 (*.G1) w0.254: v1(16.311,17.602) 16.311,15.951 18.923,13.34 J2B.1@19.73,13.34
  Bottom Layer (*.GBL) w0.254: v1(16.311,17.602) 16.616,17.907 R3B.1@16.616,19.71
NetJ2B_2: J2B.2 R4B.1 | length 9.5
  Bottom Layer (*.GBL) w0.254: J2B.2@18.796,10.8 J2B.2@19.73,10.8
  Bottom Layer (*.GBL) w1.27: J2B.2@18.796,10.8 18.567,10.8 16.896,12.471 16.896,15.062 18.064,16.231 R4B.1@19.791,16.231
NetJ2B_3: J2B.3 R5B.1 | length 9.1
  Bottom Layer (*.GBL) w0.254: J2B.3@22.27,10.8 J2B.3@22.275,10.795
  Bottom Layer (*.GBL) w1.27: R5B.1@21.569,16.231 23.322,16.231 24.592,14.961 24.592,12.395 22.997,10.8 J2B.3@22.27,10.8
NetJ2C_1: J2C.1 R3C.1 TP5C.1 | length 17.5
  Top Layer (*.GTL) w0.254: TP5C.1@29.981,26.264 29.981,24.282 29.6,23.901 29.6,18.313 v1(30.311,17.602)
  MidLayer1 (*.G1) w0.254: v1(30.311,17.602) 30.311,15.951 32.923,13.34 J2C.1@33.73,13.34
  Bottom Layer (*.GBL) w0.254: v1(30.311,17.602) 30.616,17.907 R3C.1@30.616,19.71
NetJ2C_2: J2C.2 R4C.1 | length 9.5
  Bottom Layer (*.GBL) w0.254: J2C.2@32.796,10.8 J2C.2@33.73,10.8
  Bottom Layer (*.GBL) w1.27: J2C.2@32.796,10.8 32.567,10.8 30.896,12.471 30.896,15.062 32.064,16.231 R4C.1@33.791,16.231
NetJ2C_3: J2C.3 R5C.1 | length 9.1
  Bottom Layer (*.GBL) w0.254: J2C.3@36.27,10.8 J2C.3@36.275,10.795
  Bottom Layer (*.GBL) w1.27: R5C.1@35.569,16.231 37.322,16.231 38.592,14.961 38.592,12.395 36.997,10.8 J2C.3@36.27,10.8
NetJ2D_1: J2D.1 R3D.1 TP5D.1 | length 17.5
  Top Layer (*.GTL) w0.254: TP5D.1@43.981,26.264 43.981,24.282 43.6,23.901 43.6,18.313 v1(44.311,17.602)
  MidLayer1 (*.G1) w0.254: v1(44.311,17.602) 44.311,15.951 46.923,13.34 J2D.1@47.73,13.34
  Bottom Layer (*.GBL) w0.254: v1(44.311,17.602) 44.616,17.907 R3D.1@44.616,19.71
NetJ2D_2: J2D.2 R4D.1 | length 9.5
  Bottom Layer (*.GBL) w0.254: J2D.2@46.796,10.8 J2D.2@47.73,10.8
  Bottom Layer (*.GBL) w1.27: J2D.2@46.796,10.8 46.567,10.8 44.896,12.471 44.896,15.062 46.064,16.231 R4D.1@47.791,16.231
NetJ2D_3: J2D.3 R5D.1 | length 9.1
  Bottom Layer (*.GBL) w0.254: J2D.3@50.27,10.8 J2D.3@50.275,10.795
  Bottom Layer (*.GBL) w1.27: R5D.1@49.569,16.231 51.322,16.231 52.592,14.961 52.592,12.395 50.997,10.8 J2D.3@50.27,10.8
NetJ2E_1: J2E.1 R3E.1 TP5E.1 | length 17.5
  Top Layer (*.GTL) w0.254: TP5E.1@57.981,26.264 57.981,24.282 57.6,23.901 57.6,18.313 v1(58.311,17.602)
  MidLayer1 (*.G1) w0.254: v1(58.311,17.602) 58.311,15.951 60.923,13.34 J2E.1@61.73,13.34
  Bottom Layer (*.GBL) w0.254: v1(58.311,17.602) 58.616,17.907 R3E.1@58.616,19.71
NetJ2E_2: J2E.2 R4E.1 | length 9.5
  Bottom Layer (*.GBL) w0.254: J2E.2@60.796,10.8 J2E.2@61.73,10.8
  Bottom Layer (*.GBL) w1.27: J2E.2@60.796,10.8 60.567,10.8 58.896,12.471 58.896,15.062 60.064,16.231 R4E.1@61.791,16.231
NetJ2E_3: J2E.3 R5E.1 | length 9.1
  Bottom Layer (*.GBL) w0.254: J2E.3@64.27,10.8 J2E.3@64.275,10.795
  Bottom Layer (*.GBL) w1.27: R5E.1@63.569,16.231 65.322,16.231 66.592,14.961 66.592,12.395 64.997,10.8 J2E.3@64.27,10.8
NetJ2F_1: J2F.1 R3F.1 TP5F.1 | length 17.5
  Top Layer (*.GTL) w0.254: TP5F.1@71.981,26.264 71.981,24.282 71.6,23.901 71.6,18.313 v1(72.311,17.602)
  MidLayer1 (*.G1) w0.254: v1(72.311,17.602) 72.311,15.951 74.923,13.34 J2F.1@75.73,13.34
  Bottom Layer (*.GBL) w0.254: v1(72.311,17.602) 72.616,17.907 R3F.1@72.616,19.71
NetJ2F_2: J2F.2 R4F.1 | length 9.5
  Bottom Layer (*.GBL) w0.254: J2F.2@74.796,10.8 J2F.2@75.73,10.8
  Bottom Layer (*.GBL) w1.27: J2F.2@74.796,10.8 74.567,10.8 72.896,12.471 72.896,15.062 74.064,16.231 R4F.1@75.791,16.231
NetJ2F_3: J2F.3 R5F.1 | length 9.1
  Bottom Layer (*.GBL) w0.254: J2F.3@78.27,10.8 J2F.3@78.275,10.795
  Bottom Layer (*.GBL) w1.27: R5F.1@77.569,16.231 79.322,16.231 80.592,14.961 80.592,12.395 78.997,10.8 J2F.3@78.27,10.8
NetJ2G_1: J2G.1 R3G.1 TP5G.1 | length 17.5
  Top Layer (*.GTL) w0.254: TP5G.1@85.981,26.264 85.981,24.282 85.6,23.901 85.6,18.313 v1(86.311,17.602)
  MidLayer1 (*.G1) w0.254: v1(86.311,17.602) 86.311,15.951 88.923,13.34 J2G.1@89.73,13.34
  Bottom Layer (*.GBL) w0.254: v1(86.311,17.602) 86.616,17.907 R3G.1@86.616,19.71
NetJ2G_2: J2G.2 R4G.1 | length 9.5
  Bottom Layer (*.GBL) w0.254: J2G.2@88.796,10.8 J2G.2@89.73,10.8
  Bottom Layer (*.GBL) w1.27: J2G.2@88.796,10.8 88.567,10.8 86.896,12.471 86.896,15.062 88.064,16.231 R4G.1@89.791,16.231
NetJ2G_3: J2G.3 R5G.1 | length 9.1
  Bottom Layer (*.GBL) w0.254: J2G.3@92.27,10.8 J2G.3@92.275,10.795
  Bottom Layer (*.GBL) w1.27: R5G.1@91.569,16.231 93.322,16.231 94.592,14.961 94.592,12.395 92.997,10.8 J2G.3@92.27,10.8
NetJ2H_1: J2H.1 R3H.1 TP5H.1 | length 17.5
  Top Layer (*.GTL) w0.254: TP5H.1@99.981,26.264 99.981,24.282 99.6,23.901 99.6,18.313 v1(100.311,17.602)
  MidLayer1 (*.G1) w0.254: v1(100.311,17.602) 100.311,15.951 102.923,13.34 J2H.1@103.73,13.34
  Bottom Layer (*.GBL) w0.254: v1(100.311,17.602) 100.616,17.907 R3H.1@100.616,19.71
NetJ2H_2: J2H.2 R4H.1 | length 9.5
  Bottom Layer (*.GBL) w0.254: J2H.2@102.796,10.8 J2H.2@103.73,10.8
  Bottom Layer (*.GBL) w1.27: J2H.2@102.796,10.8 102.567,10.8 100.896,12.471 100.896,15.062 102.064,16.231 R4H.1@103.791,16.231
NetJ2H_3: J2H.3 R5H.1 | length 9.1
  Bottom Layer (*.GBL) w0.254: J2H.3@106.27,10.8 J2H.3@106.275,10.795
  Bottom Layer (*.GBL) w1.27: R5H.1@105.569,16.231 107.322,16.231 108.592,14.961 108.592,12.395 106.997,10.8 J2H.3@106.27,10.8
NetL1A_1: L1A.1 U7A.19 U7A.21 U7A.23 | length 15
  Top Layer (*.GTL) w0.254: U7A.23@128.525,34.348 128.525,38.179 L1A.1@129.2,38.854 ; U7A.21@129.875,34.348 129.875,38.179 L1A.1@129.2,38.854 ; U7A.19@131.225,34.348 131.225,36.982 129.353,38.854 L1A.1@129.2,38.854
NetL1B_1: L1B.1 U7B.19 U7B.21 U7B.23 | length 15
  Top Layer (*.GTL) w0.254: U7B.23@142.525,34.348 142.525,38.179 L1B.1@143.2,38.854 ; U7B.21@143.875,34.348 143.875,38.179 L1B.1@143.2,38.854 ; U7B.19@145.225,34.348 145.225,36.982 143.353,38.854 L1B.1@143.2,38.854
NetL1C_1: L1C.1 U7C.19 U7C.21 U7C.23 | length 15
  Top Layer (*.GTL) w0.254: U7C.23@156.525,34.348 156.525,38.179 L1C.1@157.2,38.854 ; U7C.21@157.875,34.348 157.875,38.179 L1C.1@157.2,38.854 ; U7C.19@159.225,34.348 159.225,36.982 157.353,38.854 L1C.1@157.2,38.854
NetL1D_1: L1D.1 U7D.19 U7D.21 U7D.23 | length 15
  Top Layer (*.GTL) w0.254: U7D.23@170.525,34.348 170.525,38.179 L1D.1@171.2,38.854 ; U7D.21@171.875,34.348 171.875,38.179 L1D.1@171.2,38.854 ; U7D.19@173.225,34.348 173.225,36.982 171.353,38.854 L1D.1@171.2,38.854
NetL2A_1: L2A.1 U7A.6 U7A.8 U7A.10 | length 16.2
  Top Layer (*.GTL) w0.254: U7A.6@128.625,28.648 L2A.1@128.625,24.851 ; U7A.8@129.875,28.648 129.875,26.101 L2A.1@128.625,24.851 ; U7A.10@131.225,28.648 131.225,25.868 129.383,24.026 L2A.1@127.8,24.026 L2A.1@128.625,24.851
NetL2B_1: L2B.1 U7B.6 U7B.8 U7B.10 | length 16.2
  Top Layer (*.GTL) w0.254: U7B.6@142.625,28.648 L2B.1@142.625,24.851 ; U7B.8@143.875,28.648 143.875,26.101 L2B.1@142.625,24.851 ; U7B.10@145.225,28.648 145.225,25.868 143.383,24.026 L2B.1@141.8,24.026 L2B.1@142.625,24.851
NetL2C_1: L2C.1 U7C.6 U7C.8 U7C.10 | length 16.2
  Top Layer (*.GTL) w0.254: U7C.6@156.625,28.648 L2C.1@156.625,24.851 ; U7C.8@157.875,28.648 157.875,26.101 L2C.1@156.625,24.851 ; U7C.10@159.225,28.648 159.225,25.868 157.383,24.026 L2C.1@155.8,24.026 L2C.1@156.625,24.851
NetL2D_1: L2D.1 U7D.6 U7D.8 U7D.10 | length 16.2
  Top Layer (*.GTL) w0.254: U7D.6@170.625,28.648 L2D.1@170.625,24.851 ; U7D.8@171.875,28.648 171.875,26.101 L2D.1@170.625,24.851 ; U7D.10@173.225,28.648 173.225,25.868 171.383,24.026 L2D.1@169.8,24.026 L2D.1@170.625,24.851
NetQ1_3: Q1.3 U12.2 | length 3.8
  Top Layer (*.GTL) w0.254: U12.2@72.923,71.272 72.923,75.006 Q1.3@72.974,75.057
NetR1_2: R1.2 U2.4 | length 4.6
  Bottom Layer (*.GBL) w0.254: R1.2@98.806,66.548 98.806,62.019 U2.4@98.825,62
NetR2_2: R2.2 U3.4 | length 3.5
  Bottom Layer (*.GBL) w0.254: R2.2@155.931,65.481 155.931,61.969 U3.4@155.95,61.95
NetR8A_1: R8A.1 R9A.2 U7A.28 | length 6.7
  Top Layer (*.GTL) w0.254: v1(125.199,33) 125.375,33.175 U7A.28@125.375,34.348
  Bottom Layer (*.GBL) w0.254: R9A.2@123.955,34.397 123.955,34.244 v1(125.199,33) 125.123,32.923 125.123,31.222 R8A.1@124.031,30.129
NetR8B_1: R8B.1 R9B.2 U7B.28 | length 6.7
  Top Layer (*.GTL) w0.254: v1(139.199,33) 139.375,33.175 U7B.28@139.375,34.348
  Bottom Layer (*.GBL) w0.254: R9B.2@137.955,34.397 137.955,34.244 v1(139.199,33) 139.123,32.923 139.123,31.222 R8B.1@138.031,30.129
NetR8C_1: R8C.1 R9C.2 U7C.28 | length 6.7
  Top Layer (*.GTL) w0.254: v1(153.199,33) 153.375,33.175 U7C.28@153.375,34.348
  Bottom Layer (*.GBL) w0.254: R9C.2@151.955,34.397 151.955,34.244 v1(153.199,33) 153.123,32.923 153.123,31.222 R8C.1@152.031,30.129
NetR8D_1: R8D.1 R9D.2 U7D.28 | length 6.7
  Top Layer (*.GTL) w0.254: v1(167.199,33) 167.375,33.175 U7D.28@167.375,34.348
  Bottom Layer (*.GBL) w0.254: R9D.2@165.955,34.397 165.955,34.244 v1(167.199,33) 167.123,32.923 167.123,31.222 R8D.1@166.031,30.129
NetS1_2: S1.2 U11.7 | length 13.9
  Top Layer (*.GTL) w0.254: S1.2@61.112,79.533 62.345,79.533 62.568,79.756 63.01,79.756 63.035,79.731 73.177,79.731 v3(73.228,79.68)
  Bottom Layer (*.GBL) w0.254: U11.7@71.563,79.654 71.588,79.68 v3(73.228,79.68)
SCLK: U1.61 U5.16 U6A.20 U6B.20 U6C.20 U6D.20 U6E.20 U6F.20 U6G.20 U6H.20 | length 285.4
  Top Layer (*.GTL) w0.254: U6A.20@12.074,21.311 12.522,21.311 v1(13.259,21.793) ; v1(13.208,37.084) v1(27.305,37.084) v1(41.275,37.084) v2(50.114,37.084) v1(55.245,37.084) v1(69.215,37.084) v1(83.312,37.084) v1(97.282,37.084) v1(111.259,37.084) v3(113.741,37.084) v3@113.792,37.135 ; U6B.20@26.074,21.311 26.522,21.311 v1(27.259,21.793) ; U6C.20@40.074,21.311 40.522,21.311 v1(41.259,21.793) ; U1.61@50.073,64.038 50.107,64.005 50.107,62.111 v2(50.114,62.103) ; U6D.20@54.074,21.311 54.522,21.311 v1(55.259,21.793) ; U6E.20@68.074,21.311 68.522,21.311 v1(69.259,21.793) ; U6F.20@82.074,21.311 82.522,21.311 v1(83.259,21.793) ; U6G.20@96.074,21.311 96.522,21.311 v1(97.259,21.793) ; U5.16@107.556,55.823 107.601,55.778 v3(113.741,55.778) ; U6H.20@110.074,21.311 110.522,21.311 v1(111.259,21.793)
  MidLayer1 (*.G1) w0.254: v1(13.259,21.793) v1@13.259,37.084 ; v1(27.259,21.793) v1@27.259,37.084 ; v1(41.259,21.793) v1@41.259,37.084 ; v2(50.114,37.084) v2(50.114,62.103) ; v1(55.259,21.793) v1@55.259,37.084 ; v1(69.259,21.793) v1@69.259,37.084 ; v1(83.259,21.793) v1@83.259,37.084 ; v1(97.259,21.793) v1(97.282,37.084) ; v1(111.259,21.793) v1(111.259,37.084) ; v3(113.741,37.084) v3(113.741,55.778)
SCLK_FPGA: J1.S11 U1.53 | length 63.9
  Top Layer (*.GTL) w0.254: v1(28.829,53.162) 28.917,53.162 29.501,53.746 29.985,53.746 30.087,53.645 31.01,53.645 36.547,59.182 v2@46.076,59.182 ; U1.53@46.073,64.038 46.073,62.613 v2(46.126,62.56)
  MidLayer1 (*.G1) w0.254: v2(46.076,59.233) 46.076,62.509 v2(46.126,62.56)
  Bottom Layer (*.GBL) w0.254: J1.S11@-5.95,43.525 0.759,43.525 1.333,42.951 5.675,42.951 8.367,45.644 9.008,45.644 12.284,48.92 15.375,48.92 18.829,52.375 28.042,52.375 v1(28.829,53.162)
SENSE+A: C17A.2 C18A.2 R4A.2 U6A.11 | length 7.2
  Top Layer (*.GTL) w0.254: v1(5.664,22.581) 6.224,22.021 U6A.11@6.224,21.311 6.224,20.143 v1(5.893,19.812) 5.791,19.71 C17A.2@5.791,18.517
  Bottom Layer (*.GBL) w0.254: C18A.2@5.41,23.851 5.41,22.835 v1(5.664,22.581) ; R4A.2@5.791,18.517 5.791,19.71 v1(5.893,19.812)
SENSE+B: C17B.2 C18B.2 R4B.2 U6B.11 | length 7.2
  Top Layer (*.GTL) w0.254: v1(19.664,22.581) 20.224,22.021 U6B.11@20.224,21.311 20.224,20.143 v1(19.893,19.812) 19.791,19.71 C17B.2@19.791,18.517
  Bottom Layer (*.GBL) w0.254: C18B.2@19.41,23.851 19.41,22.835 v1(19.664,22.581) ; R4B.2@19.791,18.517 19.791,19.71 v1(19.893,19.812)
SENSE+C: C17C.2 C18C.2 R4C.2 U6C.11 | length 7.2
  Top Layer (*.GTL) w0.254: v1(33.664,22.581) 34.224,22.021 U6C.11@34.224,21.311 34.224,20.143 v1(33.893,19.812) 33.791,19.71 C17C.2@33.791,18.517
  Bottom Layer (*.GBL) w0.254: C18C.2@33.41,23.851 33.41,22.835 v1(33.664,22.581) ; R4C.2@33.791,18.517 33.791,19.71 v1(33.893,19.812)
SENSE+D: C17D.2 C18D.2 R4D.2 U6D.11 | length 7.2
  Top Layer (*.GTL) w0.254: v1(47.664,22.581) 48.224,22.021 U6D.11@48.224,21.311 48.224,20.143 v1(47.893,19.812) 47.791,19.71 C17D.2@47.791,18.517
  Bottom Layer (*.GBL) w0.254: C18D.2@47.41,23.851 47.41,22.835 v1(47.664,22.581) ; R4D.2@47.791,18.517 47.791,19.71 v1(47.893,19.812)
SENSE+E: C17E.2 C18E.2 R4E.2 U6E.11 | length 7.2
  Top Layer (*.GTL) w0.254: v1(61.664,22.581) 62.224,22.021 U6E.11@62.224,21.311 62.224,20.143 v1(61.893,19.812) 61.791,19.71 C17E.2@61.791,18.517
  Bottom Layer (*.GBL) w0.254: C18E.2@61.41,23.851 61.41,22.835 v1(61.664,22.581) ; R4E.2@61.791,18.517 61.791,19.71 v1(61.893,19.812)
SENSE+F: C17F.2 C18F.2 R4F.2 U6F.11 | length 7.2
  Top Layer (*.GTL) w0.254: v1(75.664,22.581) 76.224,22.021 U6F.11@76.224,21.311 76.224,20.143 v1(75.893,19.812) 75.791,19.71 C17F.2@75.791,18.517
  Bottom Layer (*.GBL) w0.254: C18F.2@75.41,23.851 75.41,22.835 v1(75.664,22.581) ; R4F.2@75.791,18.517 75.791,19.71 v1(75.893,19.812)
SENSE+G: C17G.2 C18G.2 R4G.2 U6G.11 | length 7.2
  Top Layer (*.GTL) w0.254: v1(89.664,22.581) 90.224,22.021 U6G.11@90.224,21.311 90.224,20.143 v1(89.893,19.812) 89.791,19.71 C17G.2@89.791,18.517
  Bottom Layer (*.GBL) w0.254: C18G.2@89.41,23.851 89.41,22.835 v1(89.664,22.581) ; R4G.2@89.791,18.517 89.791,19.71 v1(89.893,19.812)
SENSE+H: C17H.2 C18H.2 R4H.2 U6H.11 | length 7.2
  Top Layer (*.GTL) w0.254: v1(103.664,22.581) 104.224,22.021 U6H.11@104.224,21.311 104.224,20.143 v1(103.893,19.812) 103.791,19.71 C17H.2@103.791,18.517
  Bottom Layer (*.GBL) w0.254: C18H.2@103.41,23.851 103.41,22.835 v1(103.664,22.581) ; R4H.2@103.791,18.517 103.791,19.71 v1(103.893,19.812)
SENSE-A: C18A.1 C19A.2 R5A.2 U6A.12 | length 6.9
  Top Layer (*.GTL) w0.254: v1(7.112,22.606) 6.874,22.368 U6A.12@6.874,21.311 6.874,19.847 v1(6.934,19.787) 7.569,19.152
  Bottom Layer (*.GBL) w0.254: v1(6.934,19.787) 7.569,19.152 R5A.2@7.569,18.517 ; v1(7.112,22.606) 7.569,23.063 7.569,23.724 C18A.1@7.696,23.851
SENSE-B: C18B.1 C19B.2 R5B.2 U6B.12 | length 6.9
  Top Layer (*.GTL) w0.254: v1(21.112,22.606) 20.874,22.368 U6B.12@20.874,21.311 20.874,19.847 v1(20.934,19.787) 21.569,19.152
  Bottom Layer (*.GBL) w0.254: v1(20.934,19.787) 21.569,19.152 R5B.2@21.569,18.517 ; v1(21.112,22.606) 21.569,23.063 21.569,23.724 C18B.1@21.696,23.851
SENSE-C: C18C.1 C19C.2 R5C.2 U6C.12 | length 6.9
  Top Layer (*.GTL) w0.254: v1(35.112,22.606) 34.874,22.368 U6C.12@34.874,21.311 34.874,19.847 v1(34.934,19.787) 35.569,19.152
  Bottom Layer (*.GBL) w0.254: v1(34.934,19.787) 35.569,19.152 R5C.2@35.569,18.517 ; v1(35.112,22.606) 35.569,23.063 35.569,23.724 C18C.1@35.696,23.851
SENSE-D: C18D.1 C19D.2 R5D.2 U6D.12 | length 6.9
  Top Layer (*.GTL) w0.254: v1(49.112,22.606) 48.874,22.368 U6D.12@48.874,21.311 48.874,19.847 v1(48.934,19.787) 49.569,19.152
  Bottom Layer (*.GBL) w0.254: v1(48.934,19.787) 49.569,19.152 R5D.2@49.569,18.517 ; v1(49.112,22.606) 49.569,23.063 49.569,23.724 C18D.1@49.696,23.851
SENSE-E: C18E.1 C19E.2 R5E.2 U6E.12 | length 6.9
  Top Layer (*.GTL) w0.254: v1(63.112,22.606) 62.874,22.368 U6E.12@62.874,21.311 62.874,19.847 v1(62.934,19.787) 63.569,19.152
  Bottom Layer (*.GBL) w0.254: v1(62.934,19.787) 63.569,19.152 R5E.2@63.569,18.517 ; v1(63.112,22.606) 63.569,23.063 63.569,23.724 C18E.1@63.696,23.851
SENSE-F: C18F.1 C19F.2 R5F.2 U6F.12 | length 6.9
  Top Layer (*.GTL) w0.254: v1(77.112,22.606) 76.874,22.368 U6F.12@76.874,21.311 76.874,19.847 v1(76.934,19.787) 77.569,19.152
  Bottom Layer (*.GBL) w0.254: v1(76.934,19.787) 77.569,19.152 R5F.2@77.569,18.517 ; v1(77.112,22.606) 77.569,23.063 77.569,23.724 C18F.1@77.696,23.851
SENSE-G: C18G.1 C19G.2 R5G.2 U6G.12 | length 6.9
  Top Layer (*.GTL) w0.254: v1(91.112,22.606) 90.874,22.368 U6G.12@90.874,21.311 90.874,19.847 v1(90.934,19.787) 91.569,19.152
  Bottom Layer (*.GBL) w0.254: v1(90.934,19.787) 91.569,19.152 R5G.2@91.569,18.517 ; v1(91.112,22.606) 91.569,23.063 91.569,23.724 C18G.1@91.696,23.851
SENSE-H: C18H.1 C19H.2 R5H.2 U6H.12 | length 6.9
  Top Layer (*.GTL) w0.254: v1(105.112,22.606) 104.874,22.368 U6H.12@104.874,21.311 104.874,19.847 v1(104.934,19.787) 105.569,19.152
  Bottom Layer (*.GBL) w0.254: v1(104.934,19.787) 105.569,19.152 R5H.2@105.569,18.517 ; v1(105.112,22.606) 105.569,23.063 105.569,23.724 C18H.1@105.696,23.851
SILICON_SN: J1.S17 U12.1 | length 109.8
  Top Layer (*.GTL) w0.254: J1.S17@-5.95,35.905 0.584,35.905 8.316,43.637 53.696,43.637 54.686,42.647 62.974,42.647 63.279,42.342 67.945,42.342 v2(68.072,42.215) ; v3(68.097,69.393) U12.1@72.923,69.393
  MidLayer1 (*.G1) w0.254: v2(68.072,42.215) 68.072,69.367 v3(68.097,69.393)
T: C1.1 C2.1 C3.1 C4.1 C5.2 C6.1 C7.1 C8.1 C9.1 C10.2 C21A.2 C21B.2 C21C.2 C21D.2 C22A.1 C22B.1 C22C.1 C22D.1 C23A.1 C23B.1 C23C.1 C23D.1 C24A.1 C24B.1 C24C.1 C24D.1 C26A.1 C26B.1 C26C.1 C26D.1 C27A.1 C27B.1 C27C.1 C27D.1 C28A.1 C28B.1 C28C.1 C28D.1 C43.NEG J1.P2 R1.1 R2.1 R9A.1 R9B.1 R9C.1 R9D.1 RN1.1 RN1.3 RN1.5 RN1.7 U2.1 U2.7 U3.1 U3.7 U7A.2 U7A.5 U7A.7 U7A.22 U7A.24 U7A.29 U7B.2 U7B.5 U7B.7 U7B.22 U7B.24 U7B.29 U7C.2 U7C.5 U7C.7 U7C.22 U7C.24 U7C.29 U7D.2 U7D.5 U7D.7 U7D.22 U7D.24 U7D.29 | length 125.1
  Top Layer (*.GTL) w0.254: v1(125.834,30.536) 126.025,30.345 U7A.2@126.025,28.648 ; v1(127.917,36.175) 127.925,36.167 U7A.24@127.925,34.348 ; U7A.5@127.975,28.648 127.975,27.024 v1(127.993,27.005) ; U7A.22@129.225,34.348 129.225,36.111 v1(129.238,36.124) ; v1(129.263,27.031) 129.275,27.042 U7A.7@129.275,28.648 ; v1(139.834,30.536) 140.025,30.345 U7B.2@140.025,28.648 ; v1(141.917,36.175) 141.925,36.167 U7B.24@141.925,34.348 ; U7B.5@141.975,28.648 141.975,27.024 v1(141.993,27.005) ; U7B.22@143.225,34.348 143.225,36.111 v1(143.238,36.124) ; v1(143.263,27.031) 143.275,27.042 U7B.7@143.275,28.648 ; v1(153.834,30.536) 154.025,30.345 U7C.2@154.025,28.648 ; v1(155.917,36.175) 155.925,36.167 U7C.24@155.925,34.348 ; U7C.5@155.975,28.648 155.975,27.024 v1(155.993,27.005) ; U7C.22@157.225,34.348 157.225,36.111 v1(157.238,36.124) ; v1(157.263,27.031) 157.275,27.042 U7C.7@157.275,28.648 ; v1(167.834,30.536) 168.025,30.345 U7D.2@168.025,28.648 ; v1(169.917,36.175) 169.925,36.167 U7D.24@169.925,34.348 ; U7D.5@169.975,28.648 169.975,27.024 v1(169.993,27.005) ; U7D.22@171.225,34.348 171.225,36.111 v1(171.238,36.124) ; v1(171.263,27.031) 171.275,27.042 U7D.7@171.275,28.648
  Top Layer (*.GTL) w1.27: C43.NEG@13.081,64.262 13.081,61.57 v4(13.106,61.57)
  Bottom Layer (*.GBL) w0.254: RN1.7@123.596,53.708 RN1.5@123.596,54.508 RN1.3@123.596,55.308 RN1.1@123.596,56.108 v3(123.596,56.972) ; R9A.1@123.955,32.111 124.006,32.161 v1(124.006,33.228) ; C26A.1@124.133,39.807 124.133,41.051 v1(124.234,41.153) ; C27A.1@124.844,13.391 124.844,14.864 v1(124.869,14.889) ; v1(126.088,22.078) 127.028,23.017 C23A.1@127.028,23.576 ; C28A.1@127.358,39.908 v1(127.358,41.204) ; C22A.1@130.559,40.112 130.559,41.331 v1(130.584,41.356) ; v1(131.168,21.976) C24A.1@131.168,23.144 ; v1(134.166,38.08) C21A.2@134.166,39.375 ; R9B.1@137.955,32.111 138.006,32.161 v1(138.006,33.228) ; C26B.1@138.133,39.807 138.133,41.356 v1(138.183,41.407) ; C27B.1@138.844,13.391 138.844,14.864 v1(138.869,14.889) ; v1(140.088,22.078) 141.028,23.017 C23B.1@141.028,23.576 ; C28B.1@141.358,39.908 v1(141.358,41.204) ; C22B.1@144.559,40.112 v1(144.559,41.382) ; v1(145.168,21.976) C24B.1@145.168,23.144 ; v1(148.166,38.08) C21B.2@148.166,39.375 ; R9C.1@151.955,32.111 152.006,32.161 v1(152.006,33.228) ; C26C.1@152.133,39.807 152.133,41.051 v1(152.234,41.153) ; C27C.1@152.844,13.391 152.844,14.864 v1(152.869,14.889) ; v1(154.088,22.078) 155.028,23.017 C23C.1@155.028,23.576 ; C28C.1@155.358,39.908 v1(155.358,41.204) ; C22C.1@158.559,40.112 158.559,41.331 v1(158.584,41.356) ; v1(159.168,21.976) C24C.1@159.168,23.144 ; v1(162.166,38.08) C21C.2@162.166,39.375 ; R9D.1@165.955,32.111 166.006,32.161 v1(166.006,33.228) ; C26D.1@166.133,39.807 166.133,41.051 v1(166.234,41.153) ; C27D.1@166.844,13.391 166.844,14.864 v1(166.869,14.889) ; v1(168.088,22.078) 169.028,23.017 C23D.1@169.028,23.576 ; C28D.1@169.358,39.908 v1(169.358,41.204) ; C22D.1@172.559,40.112 172.559,41.331 v1(172.584,41.356) ; v1(173.168,21.976) C24D.1@173.168,23.144 ; v1(176.166,38.08) C21D.2@176.166,39.375
  Bottom Layer (*.GBL) w1.27: v4(1.397,61.646) -2.531,61.646 J1.P2@-5.95,65.065 -4.772,66.243 v4(1.524,66.243) ; v4(85.166,76.098) 85.217,76.048 C1.1@85.217,73.482 C4.1@85.217,71.628 C3.1@85.217,69.596 C2.1@85.217,67.564 ; R1.1@98.806,68.834 v4(98.806,71.196) ; v4(142.24,74.93) 142.367,74.803 C9.1@142.367,72.136 C8.1@142.367,69.85 C7.1@142.367,67.564 C6.1@142.367,65.532 ; R2.1@155.931,67.767 155.931,70.333 v4(155.956,70.358)
TCK: P1.1 RN2.1 U1.62 | length 77.9
  Top Layer (*.GTL) w0.254: P1.1@5.766,81.051 8.56,83.845 v2(50.698,83.845) ; U1.62@50.573,64.038 v2(50.573,66.318)
  MidLayer1 (*.G1) w0.254: v2(50.573,66.318) 50.573,83.72 v2(50.698,83.845)
  Bottom Layer (*.GBL) w0.254: P1.1@5.766,81.051 6.985,79.832 9.728,79.832 11.604,77.957 14.966,77.957 15.465,77.457 RN2.1@16.225,77.457
TDI: P1.9 RN2.7 U1.4 | length 69.5
  Top Layer (*.GTL) w0.254: P1.9@5.766,70.891 7.036,69.621 v3(21.463,69.621) ; v3(21.463,81.864) 53.619,81.864 55.166,80.317 55.251,80.317 55.503,80.066 55.503,79.209 U1.4@55.573,79.138
  MidLayer1 (*.G1) w0.254: v3(21.463,69.621) 21.438,69.647 v3(21.438,75.209) 21.463,75.235 v3(21.463,81.864)
  Bottom Layer (*.GBL) w0.254: RN2.7@16.225,75.057 16.377,75.209 v3(21.438,75.209)
TDO: P1.3 RN2.3 U1.73 | length 79.7
  Top Layer (*.GTL) w0.254: P1.3@5.766,78.511 6.807,79.553 8.407,79.553 11.963,83.109 v2(56.083,83.109) ; U1.73@56.073,64.038 56.073,66.03 v2(56.083,66.04)
  MidLayer1 (*.G1) w0.254: v2(18.186,83.083) 18.212,83.058 v2(18.212,76.683) ; v2(56.083,66.04) v2(56.083,83.109)
  Bottom Layer (*.GBL) w0.254: RN2.3@16.225,76.657 18.186,76.657 v2(18.212,76.683)
TEC_DRIVE(+)A: J3A.1 R7A.1 U7A.15 | length 26.3
  Top Layer (*.GTL) w0.254: U7A.15@133.825,34.348 133.825,32.756 v1(133.835,32.746) ; R7A.1@134.4,18.84 136.553,20.993 136.536,21.011 v1(136.401,21.011)
  Top Layer (*.GTL) w1.27: J3A.1@130,13.34 131.651,13.34 134.4,16.089 R7A.1@134.4,18.84
  Bottom Layer (*.GBL) w0.254: v1(133.835,32.746) 134.369,32.746 136.477,30.637 136.477,24.821 136.401,24.745 v1(136.401,21.011)
TEC_DRIVE(+)B: J3B.1 R7B.1 U7B.15 | length 26.3
  Top Layer (*.GTL) w0.254: U7B.15@147.825,34.348 147.825,32.756 v1(147.835,32.746) ; R7B.1@148.4,18.84 v1@150.553,20.993 ; v1(150.549,21.011) 150.683,21.011 v1@150.701,20.993
  Top Layer (*.GTL) w1.27: J3B.1@144,13.34 145.651,13.34 148.4,16.089 R7B.1@148.4,18.84
  Bottom Layer (*.GBL) w0.254: v1(147.835,32.746) 148.369,32.746 150.477,30.637 ; v1(150.549,21.011) 150.549,24.745 150.625,24.821 150.625,30.637
TEC_DRIVE(+)C: J3C.1 R7C.1 U7C.15 | length 26.3
  Top Layer (*.GTL) w0.254: U7C.15@161.825,34.348 161.825,32.756 v1(161.835,32.746) ; R7C.1@162.4,18.84 164.553,20.993 164.536,21.011 v1(164.401,21.011)
  Top Layer (*.GTL) w1.27: J3C.1@158,13.34 159.651,13.34 162.4,16.089 R7C.1@162.4,18.84
  Bottom Layer (*.GBL) w0.254: v1(161.835,32.746) 162.369,32.746 164.477,30.637 164.477,24.821 164.401,24.745 v1(164.401,21.011)